# Altium PCB ExtendBoardV1.2.PcbDoc
Units mm, origin at the board's own origin, x right, y up, seen from the top; angles counter-clockwise.
Board outline 30.5 x 26.2 mm, 2 copper layers (Top1, Bottom4), stack 1.18 mm thick; 6 components, 10 nets, 32 pads, 0 vias.
Unrouted connection lines stored in the file: 56.
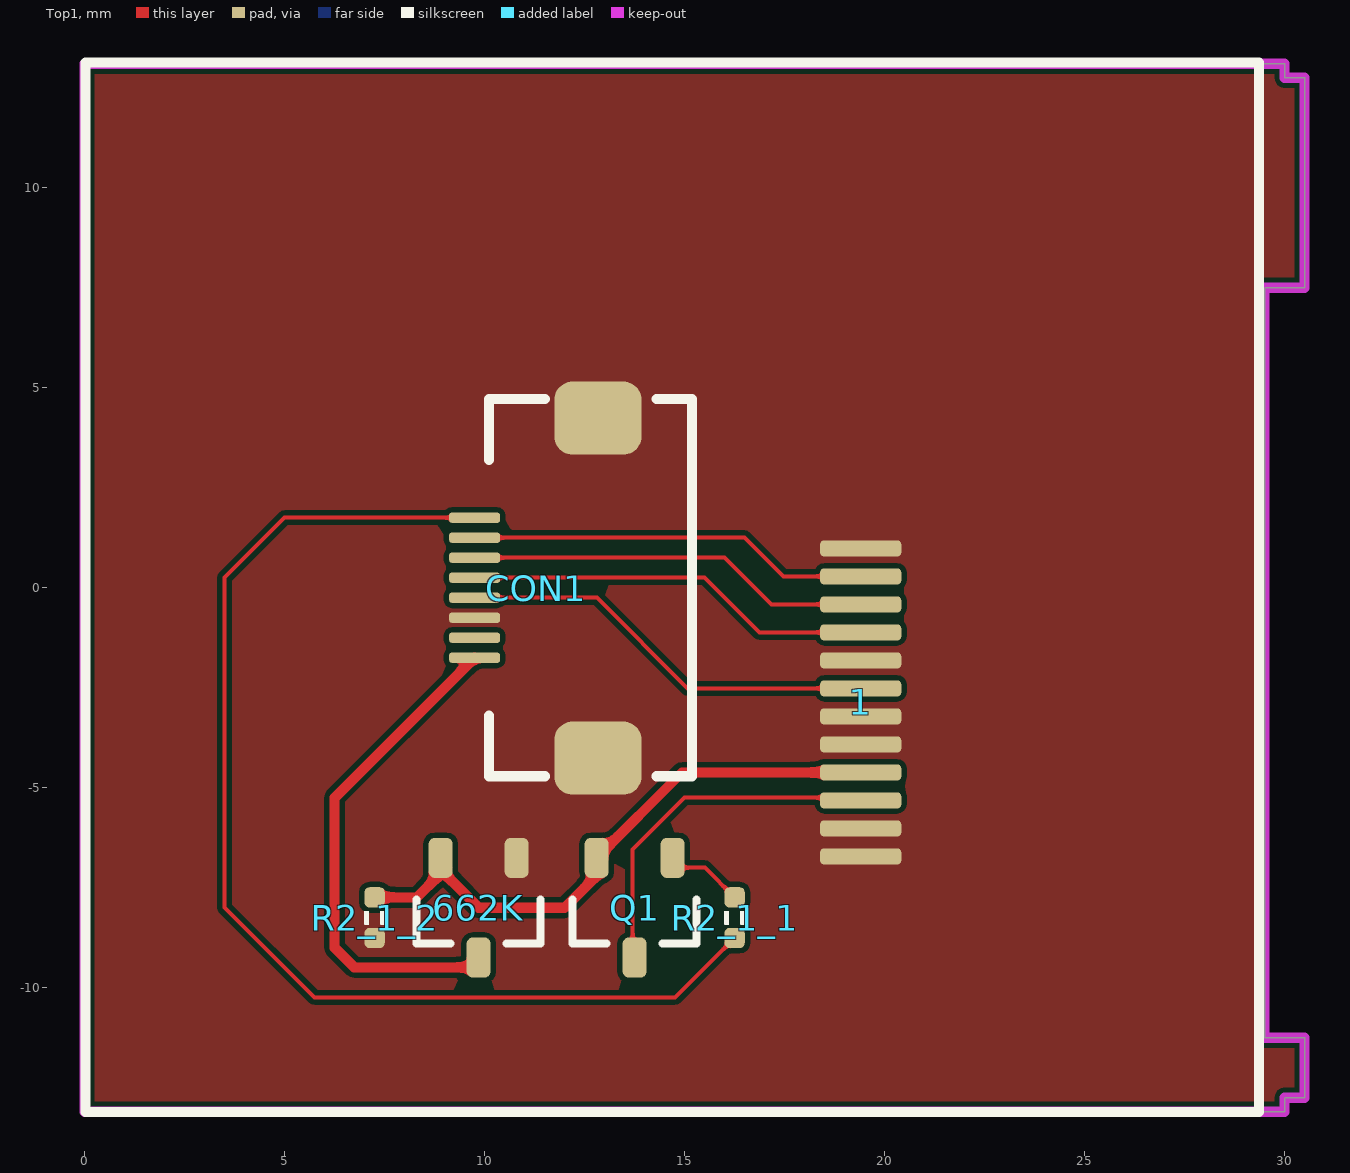
[diagram p0: Top1 view]
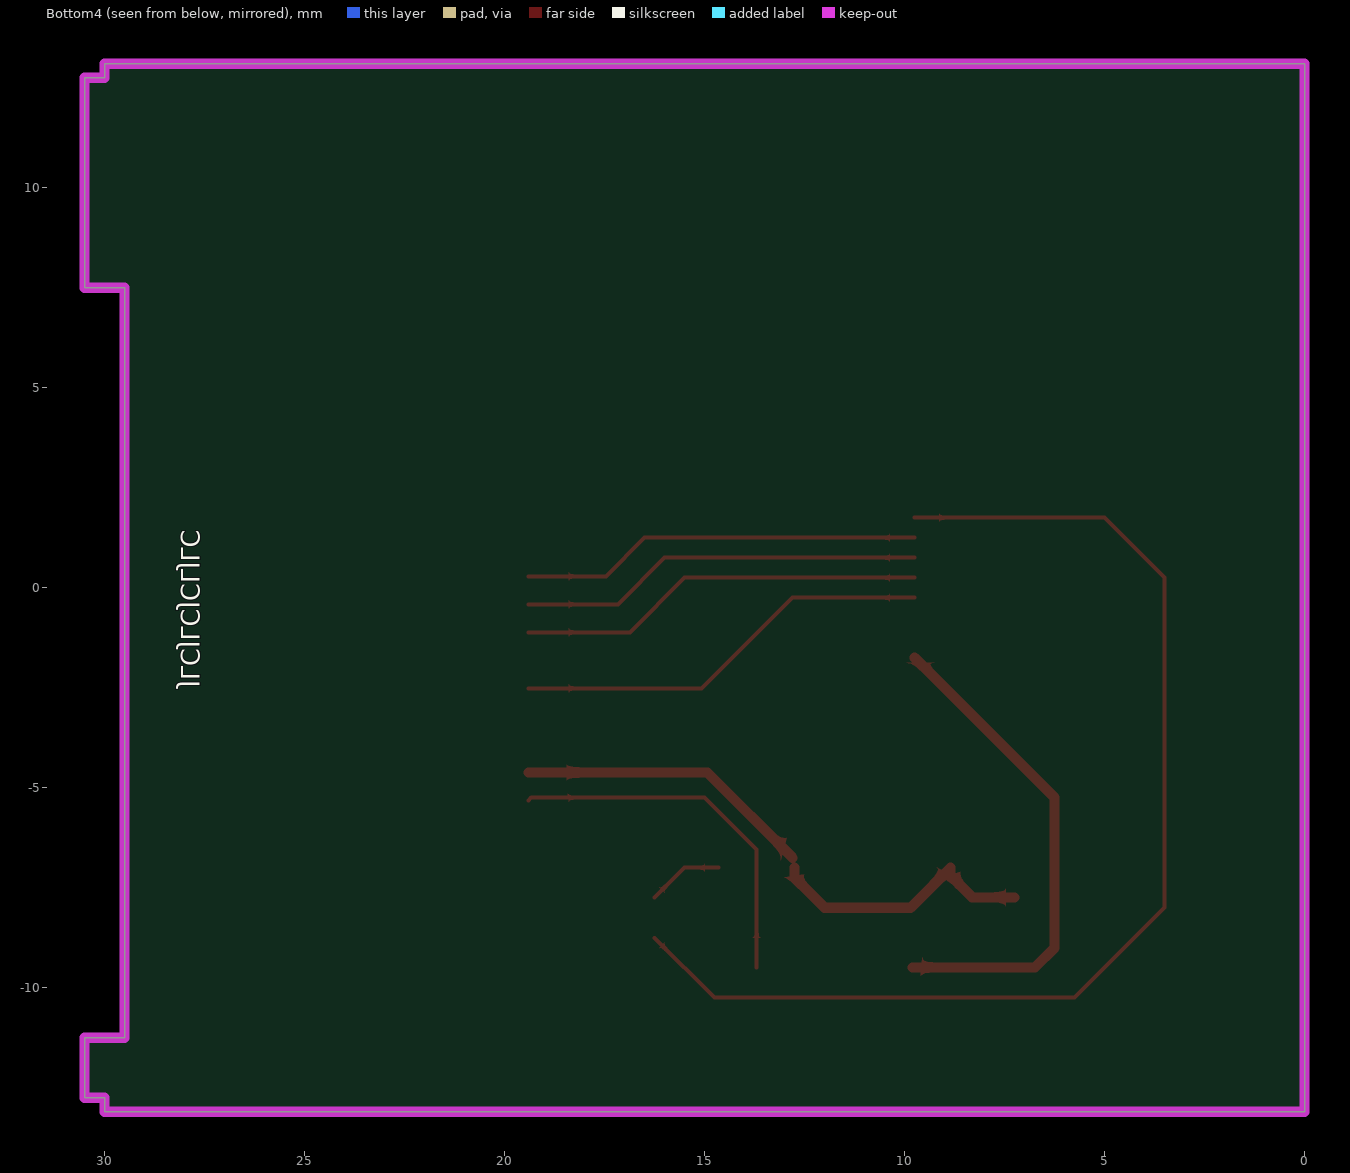
[diagram p1: Bottom4 view, seen from below]
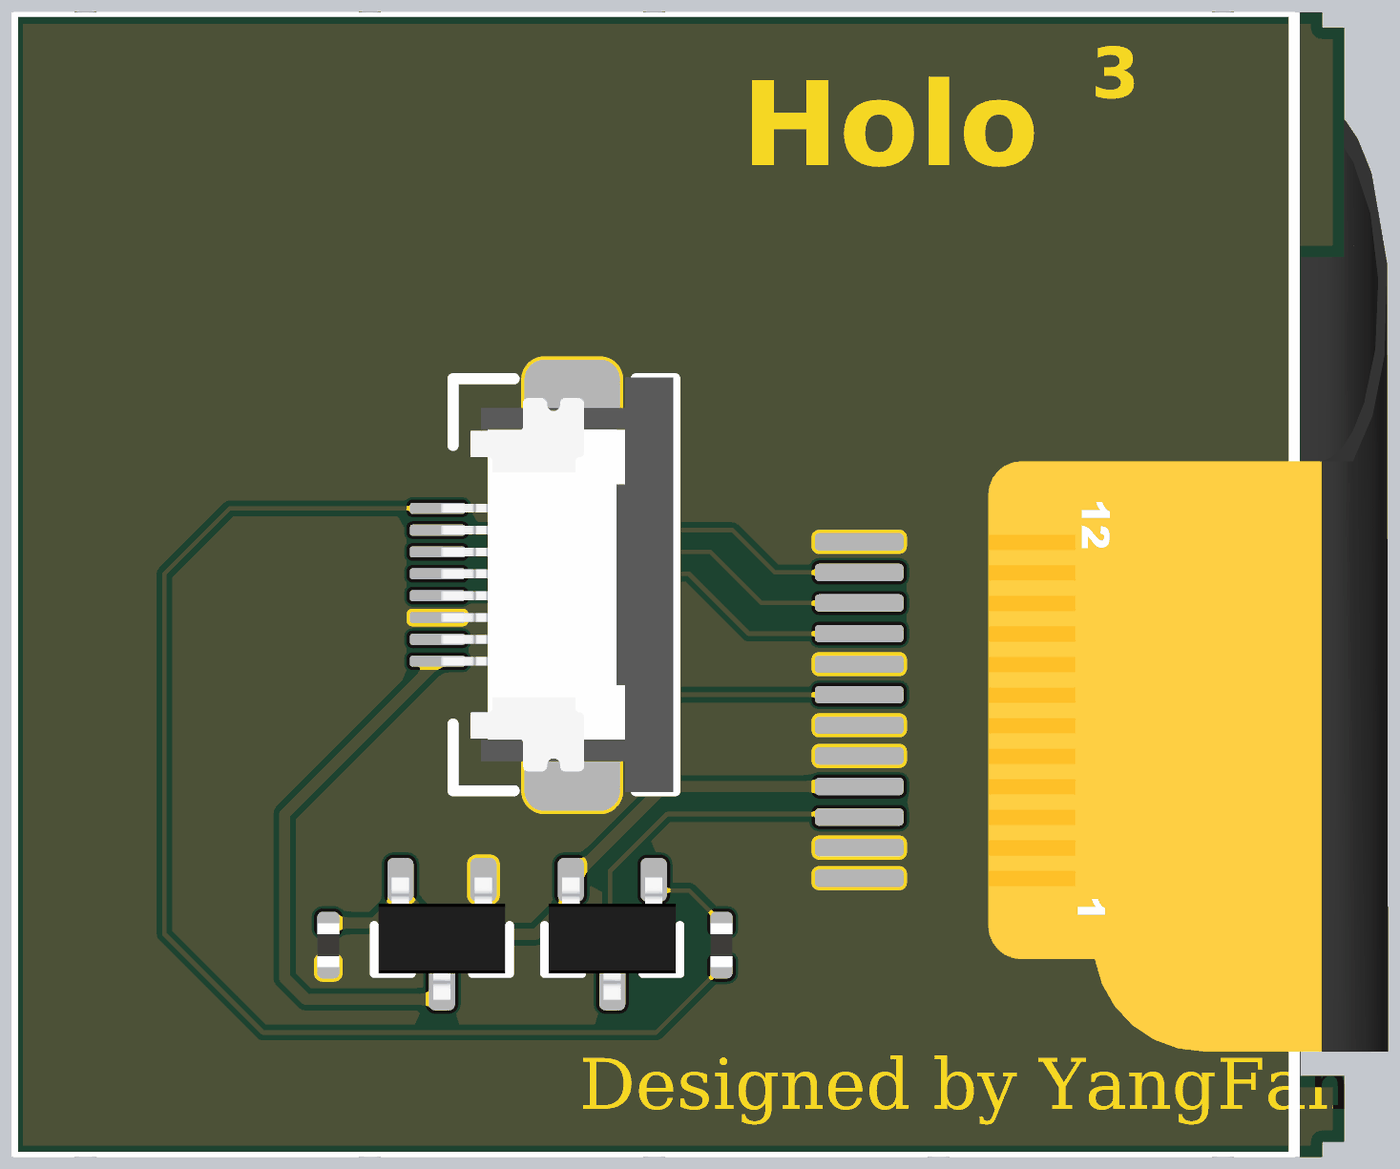
[diagram p2: 3D render of the assembled board from above, using the file's embedded part models]

## Layer stack, top to bottom
Top Solder: solder mask 0.01, Solder Resist, Dk 3.5
Top1: signal copper 0.04
Dielectric 2: core 1.1, PP-006, Dk 4.2
Bottom4: signal copper 0.04
Bottom Solder: solder mask 0.01, Solder Resist, Dk 3.5

## Board outline
0,-13.1 0,13.1 30,13.1 30,12.75 30.5,12.75 30.5,7.5 29.5,7.5 29.5,-11.25 30.5,-11.25 30.5,-12.75 30,-12.75 30,-13.1

## Design rules (kind name [scope] priority, off if disabled: settings)
Clearance [All] p1: gap=0.127 ignorepadtopadclearanceinfootprint=FALSE
ComponentClearance [All] p1: gap=0 collisioncheckmode=3 verticalgap=0 showdistances=FALSE
DiffPairsRouting [All] p1: maxlimit=0.229 minlimit=0.229 mostfreqgap=0.229 toplayer_minwidth=0.102 toplayer_maxwidth=0.102 toplayer_prefwidth=0.102 bottomlayer_minwidth=0.102 bottomlayer_maxwidth=0.102 bottomlayer_prefwidth=0.102 maxuncoupledlength=12.7
FanoutControl Fanout_BGA [All] p1: bgadir=Out bgaviamode=Centered fanoutstyle=Auto fanoutdirection=Alternating viagrid=0.025 // Fanout_BGA (Default Rule)
HoleSize [All] p1: absolutevalues=TRUE maxlimit=254 minlimit=0.203 maxpercent=80.000 minpercent=20.000
MinimumSolderMaskSliver [All] p1 off: minsoldermaskwidth=0.051
PlaneClearance [All] p1: clearance=0.203
PlaneConnect [All] p1: planeconnectstyle=Direct reliefexpansion=0.508 reliefentries=4 reliefconductorwidth=0.254 reliefairgap=0.254
PolygonConnect [All] p1: connectstyle=Direct reliefconductorwidth=0.254 reliefentries=4 polygonreliefangle="90 Angle" airgapwidth=0.254
RoutingVias [All] p1: holewidth=0.203 width=0.406 viastyle="Through Hole" minholewidth=0.152 minwidth=0.305 maxholewidth=0.711 maxwidth=1.27
SilkToBoardRegionClearance [All] p1 off:
SilkToSilkClearance [All] p1: silktosilkclearance=0
SilkToSolderMaskClearance [IsPad] p1: minsilkscreentomaskgap=0 clearancetoexposedcopper=TRUE
SolderMaskExpansion [All] p1: expansion=0.076
Width [All] p1: maxlimit=254 minlimit=0.102 preferedwidth=0.102
20 further rules are at their usual default settings.

## Classes and differential pairs
component class Main: 1 CON1 Q1

## Components (designator, comment, footprint, x,y, rotation, side; value= is the part's Value field where it differs from the comment)
1 "LCD-240x240" LCD-240X240-NOHOLE 17.145,0.445 r270 bottom locked
662K "XC6206P332MR" SOT23-3 9.85,-8 r270 top (schematic designator Q1)
CON1 "FFC_0.5_8" FFC_0.5_8 12.011,0 r90 top
Q1 "AO3415A" SOT23-3 13.75,-8 r270 top
R2_1_1 "1K" RES_0402 16.25,-8.25 r270 top value=22R (schematic designator R2)
R2_1_2 "100nF" RES_0402 7.25,-8.25 r270 top value=22R (schematic designator R2)

## Footprints (in the part's own frame and the unit in brackets; to place one, negate y for a bottom-side part, rotate by r counter-clockwise, add the part's x,y. Pads: shape width x height; smd on the part's side, far side on the other; paste and mask are expansions set on the pad)
FFC_0.5_8 [mil]
  rrect50% 72x86 smd: 0(-167.79,-32.39) 0(166.85,-32.39)
  rrect50% 10x50 smd: 1(-68.9,89) 2(-49.21,89) 3(-29.53,89) 4(-9.84,89) 5(9.84,89) 6(29.53,89) 7(49.21,89) 8(68.9,89)
  silkscreen extent -186,-125 186,75, body extent -187,-124 187,87, height 82
LCD-240X240-NOHOLE [mil]
  rrect50% 15.75x80 smd far side: 1(282,-88.9) 2(254.44,-88.9) 3(226.88,-88.9) 4(199.32,-88.9) 5(171.76,-88.9) 6(144.2,-88.9) 7(116.65,-88.9) 8(89.09,-88.9) 9(61.53,-88.9) 10(33.97,-88.9) 11(6.41,-88.9) 12(-21.15,-88.9)
  body extent -499,-565 534,673, height 20
RES_0402 [mil]
  rrect50% 20x20 smd: 1(-20,0) 2(20,0)
  silkscreen extent -7,-10 7,10, body extent -20,-10 20,10, height 14
SOT23-3 [mm] "SOT23, 3-Leads, Body 3.1x3.0mm (max), Pitch 0.95mm, IPC Medium Density"
  rrect50% 1x0.6 smd: 1(-1.246,0.95) 2(-1.246,-0.95) 3(1.246,0)
  silkscreen extent -0.2,-1.55 0.9,1.55, body extent -1.3,-1.45 1.5,1.45, height 1.2

## Part data
1: "显示屏"
662K: library part AO3415A, "低压差线性稳压芯片", LatestRevisionDate=17-Jul-2002, LatestRevisionNote="Re-released for DXP Platform.", PackageDescription="TO, Flat Index; 3 In-Line, Axial Leads; Body Dia. 4.6mm; Lead Dia. 0.5 mm (max)", PackageReference=E3, PackageVersion=1995/1996, Published=8-Jun-2000, Publisher="Altium Limited"
CON1: "FFC", System=Connector
Q1: "MOSFET", LatestRevisionDate=17-Jul-2002, LatestRevisionNote="Re-released for DXP Platform.", PackageDescription="TO, Flat Index; 3 In-Line, Axial Leads; Body Dia. 4.6mm; Lead Dia. 0.5 mm (max)", PackageReference=E3, PackageVersion=1995/1996, Published=8-Jun-2000, Publisher="Altium Limited"
R2_1_1 R2_1_2: library part 电阻-0402, "Resistor"

## Nets (pads, with @x,y where several pads share a name; then routed paths per layer and width w, separated by ;. In a path a pad name is that pad's centre, name@x,y a point inside that pad or via, vN(x,y) a via of type N, cw(c..) or ccw(c..) an arc to the next point about the centre after c; other vN are vias at no path point)
3V3: 1.4 662K.2 Q1.2 R2_1_2.1 | length 14.4
  Top1 w0.254: R2_1_2.1 8.308,-7.742 8.85,-7.2 8.85,-7 9.85,-8 12,-8 12.75,-7.25 Q1.2@12.75,-7 ; Q1.2 14.936,-4.618 1.4
DC: 1.7 CON1.4 | length 10.6
  Top1 w0.102: CON1.4 12.807,-0.25 15.076,-2.518 1.7
GND: 1.1 1.2 1.5 1.6 1.8 1.12 662K.1 CON1.0 CON1.3 R2_1_2.2
LCD_BL: CON1.8 R2_1_1.2 | length 29.4
  Top1 w0.102: CON1.8 5,1.75 3.5,0.25 3.5,-8 5.75,-10.25 14.758,-10.25 R2_1_1.2
LCD_BL_VCC: 1.3 Q1.3 | length 9.2
  Top1 w0.102: Q1.3@13.7,-9.492 13.7,-6.55 15,-5.25 19.335,-5.25 1.3
MOSI: 1.10 CON1.6 | length 10.1
  Top1 w0.102: CON1.6 16,0.75 17.168,-0.418 1.10
NetQ1_1: Q1.1 R2_1_1.1 | length 1.9
  Top1 w0.102: Q1.1@14.65,-7 15.508,-7 R2_1_1.1
RES: 1.11 CON1.7 | length 10.1
  Top1 w0.102: CON1.7 16.5,1.25 17.468,0.282 1.11
SCK: 1.9 CON1.5 | length 10.2
  Top1 w0.102: CON1.5 15.5,0.25 16.868,-1.118 1.9
VDD_5V: 662K.3 CON1.1 | length 12.5
  Top1 w0.254: CON1.1 6.25,-5.25 6.25,-9 6.742,-9.492 662K.3@9.8,-9.492
pads on no net: CON1.2

## Polygon pours and split planes (outlines as drawn)
GND on Top1 "GND" (solid, remove dead copper, pour order 0): 0,13.1 30.5,13.1 30.5,-13.1 0,-13.1

## Keep-outs
Keep-Out Layer:
  the board outline again, w0.254

## Silkscreen, mask and mechanical layers (free items; w line width, h text height)
Bottom Overlay:
  text "JLCJLCJCLJLC" at 28.25,-2.5 h0.8 r90
Top Solder:
  text "3" at 24.25,9.75 h2.29
  text "Holo" at 16.25,7.75 h3.81
  text "Designed by YangFan" at 13,-12 h2.29
Mechanical 1:
  the board outline again, w0.254